# EAGLE board 13433-SparkFun-OpenPIR-NCS36000-panel.v10 (EAGLE 7.5.0), part 1 of 3
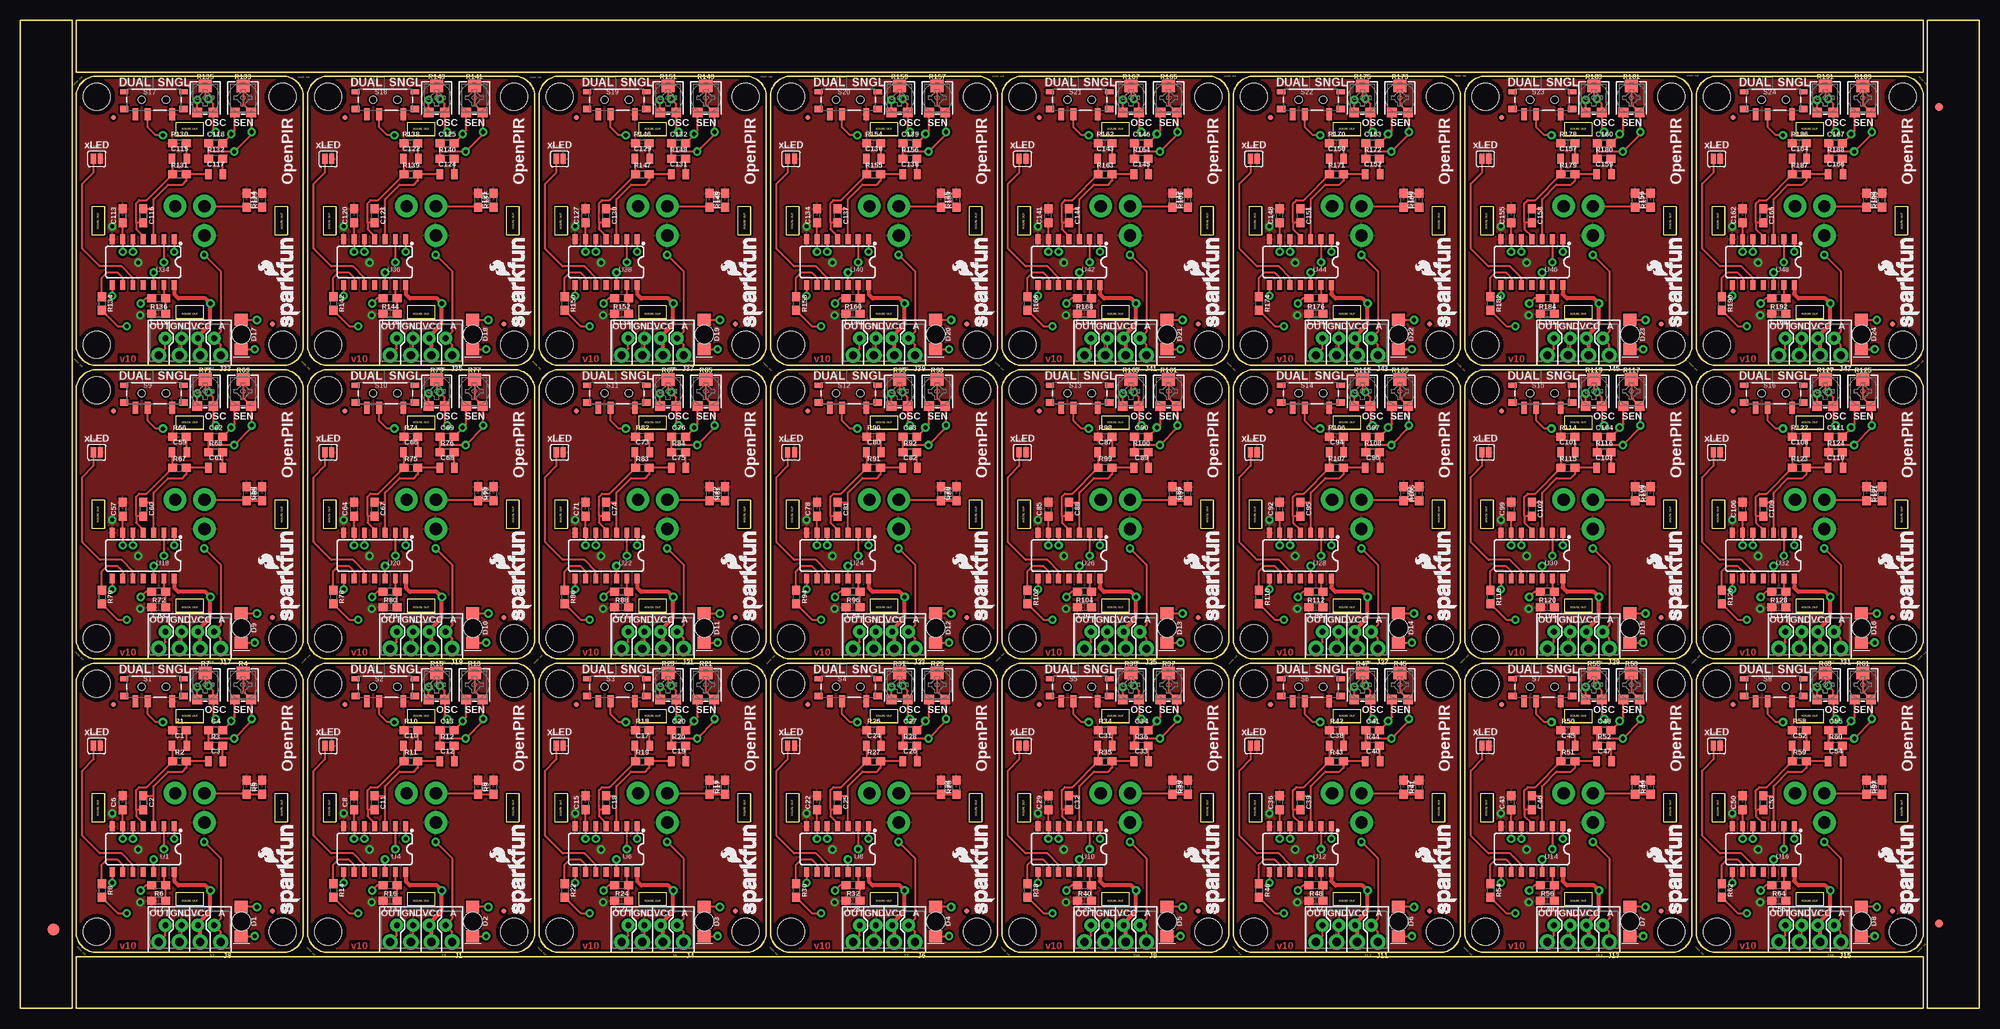
[diagram p0: board, top side]
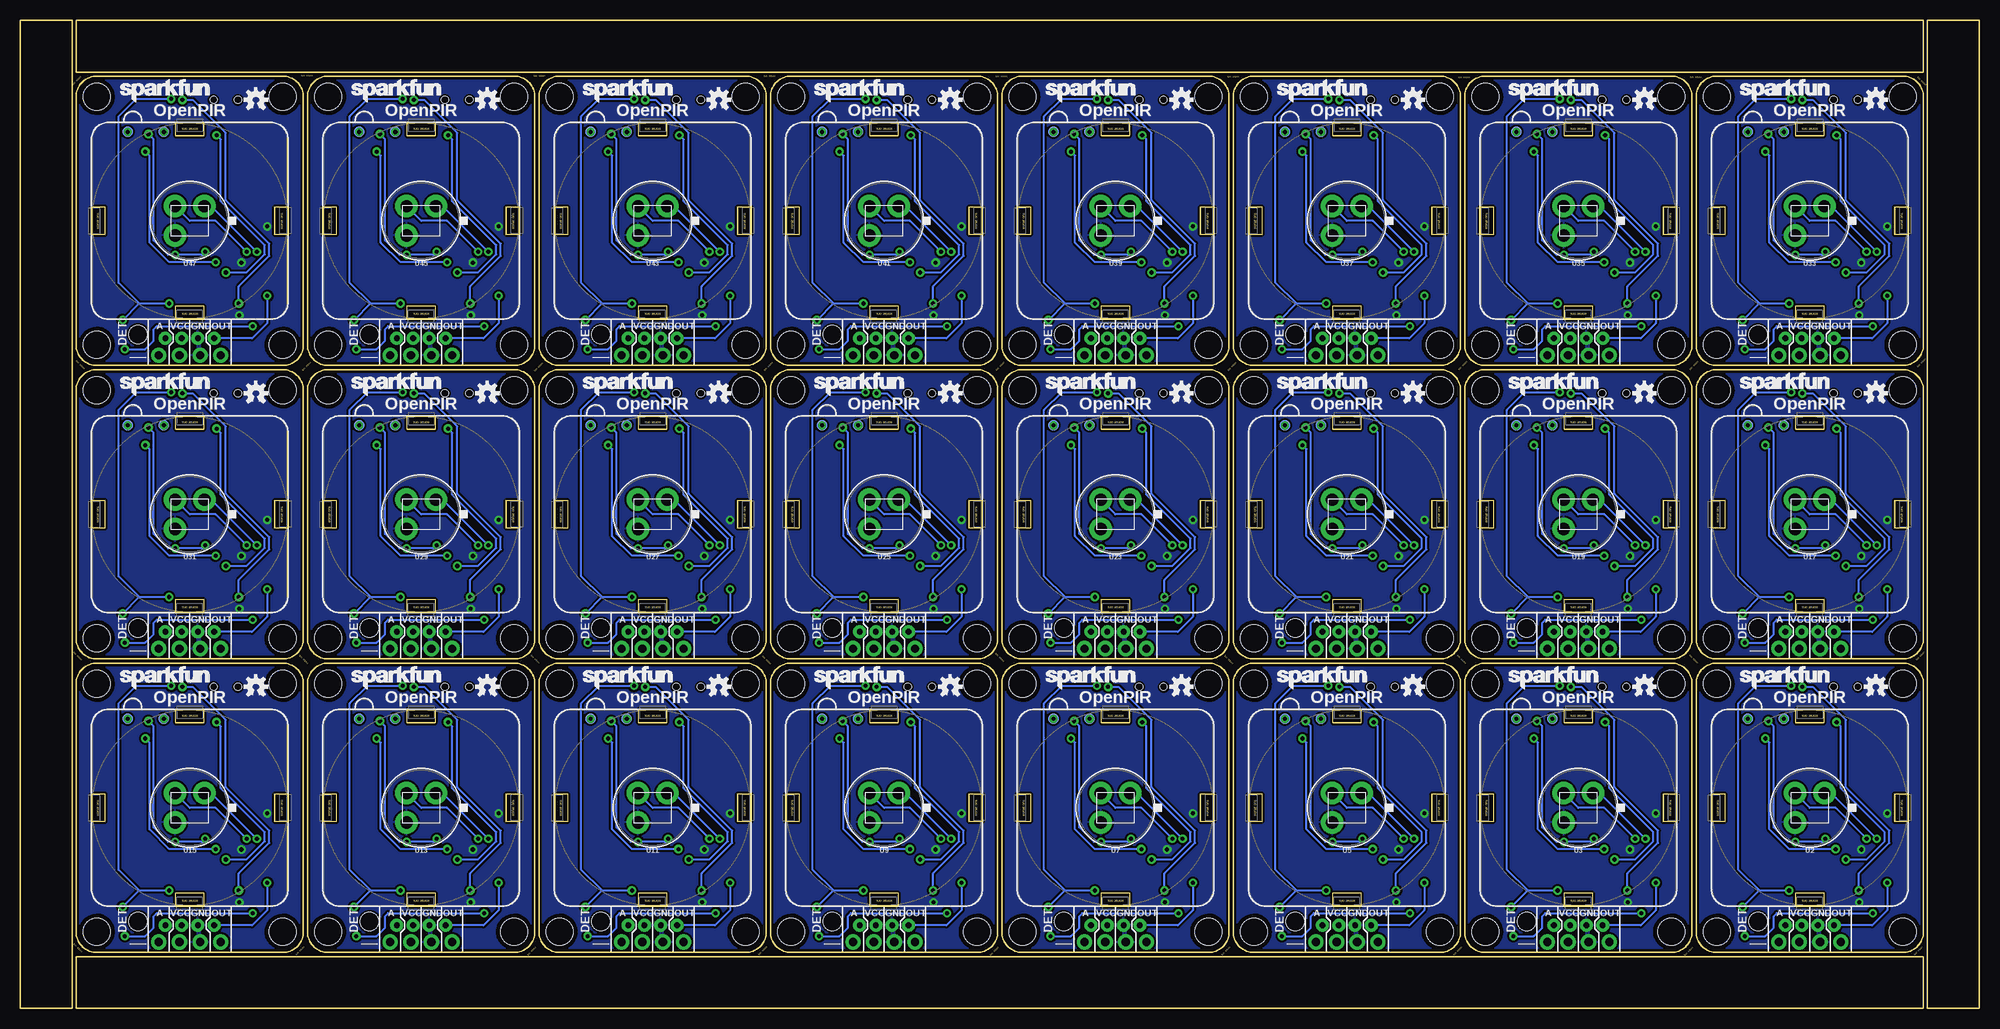
[diagram p1: board, bottom side, seen from below]

Size 240.79 x 121.41 mm. Coordinates in mm from the lower left corner, seen from the top.
Outline: 216 segments
Copper layers (1*16): Top 0.035mm / dielectric 1.5mm / Bottom 0.035mm
Design rules "SparkFun-2-layer-STANDARD": minimum track width 10mil, minimum drill 20mil, track to track 10mil, track to pad 8mil, pad to pad 8mil, via to via 10mil, smd to smd 8mil, copper to edge 8mil, drill to drill 8mil, minimum pad ring 10mil, minimum via ring 10mil, stop-mask expansion 4mil, vias tented up to drill 25mil, thermal gap 10mil

## Footprints (pad centres in the part's own frame; a part is rotated, then mirrored left to right if it is on the bottom)
0805 = smd 0.8 x 1.2: 1 -0.9,0; 2 0.9,0
0603 = smd 1.1 x 1: 1 -0.85,0; 2 0.85,0
LED-1206-BOTTOM = smd 1.5 x 1.6: A -1.8,0; C 1.8,0 | hole 2.3: 0,0
FIDUCIAL-1.5X3 = smd 1.5 x 1.5: 1 0,0
FIDUCIAL-1X2 = smd 1 x 1: 1 0,0
MICRO-FIDUCIAL = smd 0.635 x 0.635: 1 0,0
STAND-OFF = hole 3.302: 0,0
1X04_NO_SILK_ALL_ROUND = drill 1.016 pad 1.88: 1 0,0; 2 2.54,0; 3 5.08,0; 4 7.62,0
JST-4-PTH-VERT-NS = drill 0.7 pad 1.6: 1 -3,-0.55; 2 -1,-0.55; 3 1,-0.55; 4 3,-0.55
TRIMPOT-TC33X = smd 1.2 x 1.2: 1 -1,-1.8; 3 1,-1.8 | smd 1.6 x 1.5: 2 0,1.45
SWITCH-SPST-SMD-A = smd 0.7 x 1.5: 1 -2.25,-1.75; 2 -0.75,-1.75; 3 2.25,-1.75 | smd 1 x 0.6: GND1 -3.65,1; GND3 3.65,1 | smd 1 x 0.8: GND2 -3.65,-1.1; GND4 3.65,-1.1 | hole 0.9: -1.5,0; 1.5,0
SJ_2S = smd 0.635 x 1.27: 1 -0.412,0; 2 0.412,0
PAD.03X.05 = smd 1.27 x 1.27: P$1 0,0
SO14 = smd 0.6 x 1.2: 1 -3.81,-2.8; 2 -2.54,-2.8; 3 -1.27,-2.8; 4 0,-2.8; 5 1.27,-2.8; 6 2.54,-2.8; 7 3.81,-2.8; 8 3.81,2.8; 9 2.54,2.8; 10 1.27,2.8; 11 0,2.8; 12 -1.27,2.8; 13 -2.54,2.8; 14 -3.81,2.8
PIR = drill 1.5 pad 2.75: D -1.8,-1.8; G 1.8,1.8; S 1.8,-1.8

## Placement (x,y rotation side)
C1  22uF  [0805]  19.56,32.26 0 top
C2  10nF  [0603]  15.11,25.27 270 top
C3  22uF  [0805]  24,30.35 0 top
C4  10nF  [0603]  24,34.16 0 top
C5  0.1uF  [0603]  29.72,27.18 90 top
C6  0.1uF  [0603]  12.57,25.27 90 top
C7  0.1uF  [0603]  17.02,13.21 180 top
C8  0.1uF  [0603]  41.02,25.27 90 top
C9  0.1uF  [0603]  58.17,27.18 90 top
C10  22uF  [0805]  48.01,32.26 0 top
C11  10nF  [0603]  43.56,25.27 270 top
C12  22uF  [0805]  52.45,30.35 0 top
C13  10nF  [0603]  52.45,34.16 0 top
C14  0.1uF  [0603]  45.47,13.21 180 top
C15  0.1uF  [0603]  69.47,25.27 90 top
C16  0.1uF  [0603]  86.61,27.18 90 top
C17  22uF  [0805]  76.45,32.26 0 top
C18  10nF  [0603]  72.01,25.27 270 top
C19  22uF  [0805]  80.9,30.35 0 top
C20  10nF  [0603]  80.9,34.16 0 top
C21  0.1uF  [0603]  73.91,13.21 180 top
C22  0.1uF  [0603]  97.92,25.27 90 top
C23  0.1uF  [0603]  115.06,27.18 90 top
C24  22uF  [0805]  104.9,32.26 0 top
C25  10nF  [0603]  100.46,25.27 270 top
C26  22uF  [0805]  109.35,30.35 0 top
C27  10nF  [0603]  109.35,34.16 0 top
C28  0.1uF  [0603]  102.36,13.21 180 top
C29  0.1uF  [0603]  126.36,25.27 90 top
C30  0.1uF  [0603]  143.51,27.18 90 top
C31  22uF  [0805]  133.35,32.26 0 top
C32  10nF  [0603]  128.91,25.27 270 top
C33  22uF  [0805]  137.79,30.35 0 top
C34  10nF  [0603]  137.79,34.16 0 top
C35  0.1uF  [0603]  130.81,13.21 180 top
C36  0.1uF  [0603]  154.81,25.27 90 top
C37  0.1uF  [0603]  171.96,27.18 90 top
C38  22uF  [0805]  161.8,32.26 0 top
C39  10nF  [0603]  157.35,25.27 270 top
C40  22uF  [0805]  166.24,30.35 0 top
C41  10nF  [0603]  166.24,34.16 0 top
C42  0.1uF  [0603]  159.26,13.21 180 top
C43  0.1uF  [0603]  183.26,25.27 90 top
C44  0.1uF  [0603]  200.41,27.18 90 top
C45  22uF  [0805]  190.25,32.26 0 top
C46  10nF  [0603]  185.8,25.27 270 top
C47  22uF  [0805]  194.69,30.35 0 top
C48  10nF  [0603]  194.69,34.16 0 top
C49  0.1uF  [0603]  187.71,13.21 180 top
C50  0.1uF  [0603]  211.71,25.27 90 top
C51  0.1uF  [0603]  228.85,27.18 90 top
C52  22uF  [0805]  218.69,32.26 0 top
C53  10nF  [0603]  214.25,25.27 270 top
C54  22uF  [0805]  223.14,30.35 0 top
C55  10nF  [0603]  223.14,34.16 0 top
C56  0.1uF  [0603]  216.15,13.21 180 top
C57  0.1uF  [0603]  12.57,61.34 90 top
C58  0.1uF  [0603]  29.72,63.25 90 top
C59  22uF  [0805]  19.56,68.33 0 top
C60  10nF  [0603]  15.11,61.34 270 top
C61  22uF  [0805]  24,66.42 0 top
C62  10nF  [0603]  24,70.23 0 top
C63  0.1uF  [0603]  17.02,49.28 180 top
C64  0.1uF  [0603]  41.02,61.34 90 top
C65  0.1uF  [0603]  58.17,63.25 90 top
C66  22uF  [0805]  48.01,68.33 0 top
C67  10nF  [0603]  43.56,61.34 270 top
C68  22uF  [0805]  52.45,66.42 0 top
C69  10nF  [0603]  52.45,70.23 0 top
C70  0.1uF  [0603]  45.47,49.28 180 top
C71  0.1uF  [0603]  69.47,61.34 90 top
C72  0.1uF  [0603]  86.61,63.25 90 top
C73  22uF  [0805]  76.45,68.33 0 top
C74  10nF  [0603]  72.01,61.34 270 top
C75  22uF  [0805]  80.9,66.42 0 top
C76  10nF  [0603]  80.9,70.23 0 top
C77  0.1uF  [0603]  73.91,49.28 180 top
C78  0.1uF  [0603]  97.92,61.34 90 top
C79  0.1uF  [0603]  115.06,63.25 90 top
C80  22uF  [0805]  104.9,68.33 0 top
C81  10nF  [0603]  100.46,61.34 270 top
C82  22uF  [0805]  109.35,66.42 0 top
C83  10nF  [0603]  109.35,70.23 0 top
C84  0.1uF  [0603]  102.36,49.28 180 top
C85  0.1uF  [0603]  126.36,61.34 90 top
C86  0.1uF  [0603]  143.51,63.25 90 top
C87  22uF  [0805]  133.35,68.33 0 top
C88  10nF  [0603]  128.91,61.34 270 top
C89  22uF  [0805]  137.79,66.42 0 top
C90  10nF  [0603]  137.79,70.23 0 top
C91  0.1uF  [0603]  130.81,49.28 180 top
C92  0.1uF  [0603]  154.81,61.34 90 top
C93  0.1uF  [0603]  171.96,63.25 90 top
C94  22uF  [0805]  161.8,68.33 0 top
C95  10nF  [0603]  157.35,61.34 270 top
C96  22uF  [0805]  166.24,66.42 0 top
C97  10nF  [0603]  166.24,70.23 0 top
C98  0.1uF  [0603]  159.26,49.28 180 top
C99  0.1uF  [0603]  183.26,61.34 90 top
C100  0.1uF  [0603]  200.41,63.25 90 top
C101  22uF  [0805]  190.25,68.33 0 top
C102  10nF  [0603]  185.8,61.34 270 top
C103  22uF  [0805]  194.69,66.42 0 top
C104  10nF  [0603]  194.69,70.23 0 top
C105  0.1uF  [0603]  187.71,49.28 180 top
C106  0.1uF  [0603]  211.71,61.34 90 top
C107  0.1uF  [0603]  228.85,63.25 90 top
C108  22uF  [0805]  218.69,68.33 0 top
C109  10nF  [0603]  214.25,61.34 270 top
C110  22uF  [0805]  223.14,66.42 0 top
C111  10nF  [0603]  223.14,70.23 0 top
C112  0.1uF  [0603]  216.15,49.28 180 top
C113  0.1uF  [0603]  12.57,97.41 90 top
C114  0.1uF  [0603]  29.72,99.31 90 top
C115  22uF  [0805]  19.56,104.39 0 top
C116  10nF  [0603]  15.11,97.41 270 top
C117  22uF  [0805]  24,102.49 0 top
C118  10nF  [0603]  24,106.3 0 top
C119  0.1uF  [0603]  17.02,85.34 180 top
C120  0.1uF  [0603]  41.02,97.41 90 top
C121  0.1uF  [0603]  58.17,99.31 90 top
C122  22uF  [0805]  48.01,104.39 0 top
C123  10nF  [0603]  43.56,97.41 270 top
C124  22uF  [0805]  52.45,102.49 0 top
C125  10nF  [0603]  52.45,106.3 0 top
C126  0.1uF  [0603]  45.47,85.34 180 top
C127  0.1uF  [0603]  69.47,97.41 90 top
C128  0.1uF  [0603]  86.61,99.31 90 top
C129  22uF  [0805]  76.45,104.39 0 top
C130  10nF  [0603]  72.01,97.41 270 top
C131  22uF  [0805]  80.9,102.49 0 top
C132  10nF  [0603]  80.9,106.3 0 top
C133  0.1uF  [0603]  73.91,85.34 180 top
C134  0.1uF  [0603]  97.92,97.41 90 top
C135  0.1uF  [0603]  115.06,99.31 90 top
C136  22uF  [0805]  104.9,104.39 0 top
C137  10nF  [0603]  100.46,97.41 270 top
C138  22uF  [0805]  109.35,102.49 0 top
C139  10nF  [0603]  109.35,106.3 0 top
C140  0.1uF  [0603]  102.36,85.34 180 top
C141  0.1uF  [0603]  126.36,97.41 90 top
C142  0.1uF  [0603]  143.51,99.31 90 top
C143  22uF  [0805]  133.35,104.39 0 top
C144  10nF  [0603]  128.91,97.41 270 top
C145  22uF  [0805]  137.79,102.49 0 top
C146  10nF  [0603]  137.79,106.3 0 top
C147  0.1uF  [0603]  130.81,85.34 180 top
C148  0.1uF  [0603]  154.81,97.41 90 top
C149  0.1uF  [0603]  171.96,99.31 90 top
C150  22uF  [0805]  161.8,104.39 0 top
C151  10nF  [0603]  157.35,97.41 270 top
C152  22uF  [0805]  166.24,102.49 0 top
C153  10nF  [0603]  166.24,106.3 0 top
C154  0.1uF  [0603]  159.26,85.34 180 top
C155  0.1uF  [0603]  183.26,97.41 90 top
C156  0.1uF  [0603]  200.41,99.31 90 top
C157  22uF  [0805]  190.25,104.39 0 top
C158  10nF  [0603]  185.8,97.41 270 top
C159  22uF  [0805]  194.69,102.49 0 top
C160  10nF  [0603]  194.69,106.3 0 top
C161  0.1uF  [0603]  187.71,85.34 180 top
C162  0.1uF  [0603]  211.71,97.41 90 top
C163  0.1uF  [0603]  228.85,99.31 90 top
C164  22uF  [0805]  218.69,104.39 0 top
C165  10nF  [0603]  214.25,97.41 270 top
C166  22uF  [0805]  223.14,102.49 0 top
C167  10nF  [0603]  223.14,106.3 0 top
C168  0.1uF  [0603]  216.15,85.34 180 top
D1  Green  [LED-1206-BOTTOM]  27.18,10.67 270 top
D2  Green  [LED-1206-BOTTOM]  55.63,10.67 270 top
D3  Green  [LED-1206-BOTTOM]  84.07,10.67 270 top
D4  Green  [LED-1206-BOTTOM]  112.52,10.67 270 top
D5  Green  [LED-1206-BOTTOM]  140.97,10.67 270 top
D6  Green  [LED-1206-BOTTOM]  169.42,10.67 270 top
D7  Green  [LED-1206-BOTTOM]  197.87,10.67 270 top
D8  Green  [LED-1206-BOTTOM]  226.31,10.67 270 top
D9  Green  [LED-1206-BOTTOM]  27.18,46.74 270 top
D10  Green  [LED-1206-BOTTOM]  55.63,46.74 270 top
D11  Green  [LED-1206-BOTTOM]  84.07,46.74 270 top
D12  Green  [LED-1206-BOTTOM]  112.52,46.74 270 top
D13  Green  [LED-1206-BOTTOM]  140.97,46.74 270 top
D14  Green  [LED-1206-BOTTOM]  169.42,46.74 270 top
D15  Green  [LED-1206-BOTTOM]  197.87,46.74 270 top
D16  Green  [LED-1206-BOTTOM]  226.31,46.74 270 top
D17  Green  [LED-1206-BOTTOM]  27.18,82.8 270 top
D18  Green  [LED-1206-BOTTOM]  55.63,82.8 270 top
D19  Green  [LED-1206-BOTTOM]  84.07,82.8 270 top
D20  Green  [LED-1206-BOTTOM]  112.52,82.8 270 top
D21  Green  [LED-1206-BOTTOM]  140.97,82.8 270 top
D22  Green  [LED-1206-BOTTOM]  169.42,82.8 270 top
D23  Green  [LED-1206-BOTTOM]  197.87,82.8 270 top
D24  Green  [LED-1206-BOTTOM]  226.31,82.8 270 top
E$1  [FIDUCIAL-1.5X3]  4.06,9.65 0 top
E$5  [FIDUCIAL-1X2]  235.84,110.74 180 top
E$6  [FIDUCIAL-1X2]  235.84,10.41 0 top
FD1  FIDUCIALUFIDUCIAL  [MICRO-FIDUCIAL]  11.43,37.34 0 top
FD2  FIDUCIALUFIDUCIAL  [MICRO-FIDUCIAL]  30.99,11.94 0 top
FD3  FIDUCIALUFIDUCIAL  [MICRO-FIDUCIAL]  39.88,37.34 0 top
FD4  FIDUCIALUFIDUCIAL  [MICRO-FIDUCIAL]  59.44,11.94 0 top
FD5  FIDUCIALUFIDUCIAL  [MICRO-FIDUCIAL]  68.33,37.34 0 top
FD6  FIDUCIALUFIDUCIAL  [MICRO-FIDUCIAL]  87.88,11.94 0 top
FD7  FIDUCIALUFIDUCIAL  [MICRO-FIDUCIAL]  96.77,37.34 0 top
FD8  FIDUCIALUFIDUCIAL  [MICRO-FIDUCIAL]  116.33,11.94 0 top
FD9  FIDUCIALUFIDUCIAL  [MICRO-FIDUCIAL]  125.22,37.34 0 top
FD10  FIDUCIALUFIDUCIAL  [MICRO-FIDUCIAL]  144.78,11.94 0 top
FD11  FIDUCIALUFIDUCIAL  [MICRO-FIDUCIAL]  153.67,37.34 0 top
FD12  FIDUCIALUFIDUCIAL  [MICRO-FIDUCIAL]  173.23,11.94 0 top
FD13  FIDUCIALUFIDUCIAL  [MICRO-FIDUCIAL]  182.12,37.34 0 top
FD14  FIDUCIALUFIDUCIAL  [MICRO-FIDUCIAL]  201.68,11.94 0 top
FD15  FIDUCIALUFIDUCIAL  [MICRO-FIDUCIAL]  210.57,37.34 0 top
FD16  FIDUCIALUFIDUCIAL  [MICRO-FIDUCIAL]  230.12,11.94 0 top
FD17  FIDUCIALUFIDUCIAL  [MICRO-FIDUCIAL]  11.43,73.41 0 top
FD18  FIDUCIALUFIDUCIAL  [MICRO-FIDUCIAL]  30.99,48.01 0 top
FD19  FIDUCIALUFIDUCIAL  [MICRO-FIDUCIAL]  39.88,73.41 0 top
FD20  FIDUCIALUFIDUCIAL  [MICRO-FIDUCIAL]  59.44,48.01 0 top
FD21  FIDUCIALUFIDUCIAL  [MICRO-FIDUCIAL]  68.33,73.41 0 top
FD22  FIDUCIALUFIDUCIAL  [MICRO-FIDUCIAL]  87.88,48.01 0 top
FD23  FIDUCIALUFIDUCIAL  [MICRO-FIDUCIAL]  96.77,73.41 0 top
FD24  FIDUCIALUFIDUCIAL  [MICRO-FIDUCIAL]  116.33,48.01 0 top
FD25  FIDUCIALUFIDUCIAL  [MICRO-FIDUCIAL]  125.22,73.41 0 top
FD26  FIDUCIALUFIDUCIAL  [MICRO-FIDUCIAL]  144.78,48.01 0 top
FD27  FIDUCIALUFIDUCIAL  [MICRO-FIDUCIAL]  153.67,73.41 0 top
FD28  FIDUCIALUFIDUCIAL  [MICRO-FIDUCIAL]  173.23,48.01 0 top
FD29  FIDUCIALUFIDUCIAL  [MICRO-FIDUCIAL]  182.12,73.41 0 top
FD30  FIDUCIALUFIDUCIAL  [MICRO-FIDUCIAL]  201.68,48.01 0 top
FD31  FIDUCIALUFIDUCIAL  [MICRO-FIDUCIAL]  210.57,73.41 0 top
FD32  FIDUCIALUFIDUCIAL  [MICRO-FIDUCIAL]  230.12,48.01 0 top
FD33  FIDUCIALUFIDUCIAL  [MICRO-FIDUCIAL]  11.43,109.47 0 top
FD34  FIDUCIALUFIDUCIAL  [MICRO-FIDUCIAL]  30.99,84.07 0 top
FD35  FIDUCIALUFIDUCIAL  [MICRO-FIDUCIAL]  39.88,109.47 0 top
FD36  FIDUCIALUFIDUCIAL  [MICRO-FIDUCIAL]  59.44,84.07 0 top
FD37  FIDUCIALUFIDUCIAL  [MICRO-FIDUCIAL]  68.33,109.47 0 top
FD38  FIDUCIALUFIDUCIAL  [MICRO-FIDUCIAL]  87.88,84.07 0 top
FD39  FIDUCIALUFIDUCIAL  [MICRO-FIDUCIAL]  96.77,109.47 0 top
FD40  FIDUCIALUFIDUCIAL  [MICRO-FIDUCIAL]  116.33,84.07 0 top
FD41  FIDUCIALUFIDUCIAL  [MICRO-FIDUCIAL]  125.22,109.47 0 top
FD42  FIDUCIALUFIDUCIAL  [MICRO-FIDUCIAL]  144.78,84.07 0 top
FD43  FIDUCIALUFIDUCIAL  [MICRO-FIDUCIAL]  153.67,109.47 0 top
FD44  FIDUCIALUFIDUCIAL  [MICRO-FIDUCIAL]  173.23,84.07 0 top
FD45  FIDUCIALUFIDUCIAL  [MICRO-FIDUCIAL]  182.12,109.47 0 top
FD46  FIDUCIALUFIDUCIAL  [MICRO-FIDUCIAL]  201.68,84.07 0 top
FD47  FIDUCIALUFIDUCIAL  [MICRO-FIDUCIAL]  210.57,109.47 0 top
FD48  FIDUCIALUFIDUCIAL  [MICRO-FIDUCIAL]  230.12,84.07 0 top
H1  STAND-OFF  [STAND-OFF]  9.4,39.88 0 top
H2  STAND-OFF  [STAND-OFF]  32.26,39.88 0 top
H3  STAND-OFF  [STAND-OFF]  9.4,9.4 0 top
H4  STAND-OFF  [STAND-OFF]  32.26,9.4 0 top
H5  STAND-OFF  [STAND-OFF]  37.85,39.88 0 top
H6  STAND-OFF  [STAND-OFF]  60.71,39.88 0 top
H7  STAND-OFF  [STAND-OFF]  37.85,9.4 0 top
H8  STAND-OFF  [STAND-OFF]  60.71,9.4 0 top
H9  STAND-OFF  [STAND-OFF]  66.29,39.88 0 top
H10  STAND-OFF  [STAND-OFF]  89.15,39.88 0 top
H11  STAND-OFF  [STAND-OFF]  66.29,9.4 0 top
H12  STAND-OFF  [STAND-OFF]  89.15,9.4 0 top
H13  STAND-OFF  [STAND-OFF]  94.74,39.88 0 top
H14  STAND-OFF  [STAND-OFF]  117.6,39.88 0 top
H15  STAND-OFF  [STAND-OFF]  94.74,9.4 0 top
H16  STAND-OFF  [STAND-OFF]  117.6,9.4 0 top
H17  STAND-OFF  [STAND-OFF]  123.19,39.88 0 top
H18  STAND-OFF  [STAND-OFF]  146.05,39.88 0 top
H19  STAND-OFF  [STAND-OFF]  123.19,9.4 0 top
H20  STAND-OFF  [STAND-OFF]  146.05,9.4 0 top
H21  STAND-OFF  [STAND-OFF]  151.64,39.88 0 top
H22  STAND-OFF  [STAND-OFF]  174.5,39.88 0 top
H23  STAND-OFF  [STAND-OFF]  151.64,9.4 0 top
H24  STAND-OFF  [STAND-OFF]  174.5,9.4 0 top
H25  STAND-OFF  [STAND-OFF]  180.09,39.88 0 top
H26  STAND-OFF  [STAND-OFF]  202.95,39.88 0 top
H27  STAND-OFF  [STAND-OFF]  180.09,9.4 0 top
H28  STAND-OFF  [STAND-OFF]  202.95,9.4 0 top
H29  STAND-OFF  [STAND-OFF]  208.53,39.88 0 top
H30  STAND-OFF  [STAND-OFF]  231.39,39.88 0 top
H31  STAND-OFF  [STAND-OFF]  208.53,9.4 0 top
H32  STAND-OFF  [STAND-OFF]  231.39,9.4 0 top
H33  STAND-OFF  [STAND-OFF]  9.4,75.95 0 top
H34  STAND-OFF  [STAND-OFF]  32.26,75.95 0 top
H35  STAND-OFF  [STAND-OFF]  9.4,45.47 0 top
H36  STAND-OFF  [STAND-OFF]  32.26,45.47 0 top
H37  STAND-OFF  [STAND-OFF]  37.85,75.95 0 top
H38  STAND-OFF  [STAND-OFF]  60.71,75.95 0 top
H39  STAND-OFF  [STAND-OFF]  37.85,45.47 0 top
H40  STAND-OFF  [STAND-OFF]  60.71,45.47 0 top
H41  STAND-OFF  [STAND-OFF]  66.29,75.95 0 top
H42  STAND-OFF  [STAND-OFF]  89.15,75.95 0 top
H43  STAND-OFF  [STAND-OFF]  66.29,45.47 0 top
H44  STAND-OFF  [STAND-OFF]  89.15,45.47 0 top
H45  STAND-OFF  [STAND-OFF]  94.74,75.95 0 top
H46  STAND-OFF  [STAND-OFF]  117.6,75.95 0 top
H47  STAND-OFF  [STAND-OFF]  94.74,45.47 0 top
H48  STAND-OFF  [STAND-OFF]  117.6,45.47 0 top
H49  STAND-OFF  [STAND-OFF]  123.19,75.95 0 top
H50  STAND-OFF  [STAND-OFF]  146.05,75.95 0 top
H51  STAND-OFF  [STAND-OFF]  123.19,45.47 0 top
H52  STAND-OFF  [STAND-OFF]  146.05,45.47 0 top
H53  STAND-OFF  [STAND-OFF]  151.64,75.95 0 top
H54  STAND-OFF  [STAND-OFF]  174.5,75.95 0 top
H55  STAND-OFF  [STAND-OFF]  151.64,45.47 0 top
H56  STAND-OFF  [STAND-OFF]  174.5,45.47 0 top
H57  STAND-OFF  [STAND-OFF]  180.09,75.95 0 top
H58  STAND-OFF  [STAND-OFF]  202.95,75.95 0 top
H59  STAND-OFF  [STAND-OFF]  180.09,45.47 0 top
H60  STAND-OFF  [STAND-OFF]  202.95,45.47 0 top
H61  STAND-OFF  [STAND-OFF]  208.53,75.95 0 top
H62  STAND-OFF  [STAND-OFF]  231.39,75.95 0 top
H63  STAND-OFF  [STAND-OFF]  208.53,45.47 0 top
H64  STAND-OFF  [STAND-OFF]  231.39,45.47 0 top
H65  STAND-OFF  [STAND-OFF]  9.4,112.01 0 top
H66  STAND-OFF  [STAND-OFF]  32.26,112.01 0 top
H67  STAND-OFF  [STAND-OFF]  9.4,81.53 0 top
H68  STAND-OFF  [STAND-OFF]  32.26,81.53 0 top
H69  STAND-OFF  [STAND-OFF]  37.85,112.01 0 top
H70  STAND-OFF  [STAND-OFF]  60.71,112.01 0 top
H71  STAND-OFF  [STAND-OFF]  37.85,81.53 0 top
H72  STAND-OFF  [STAND-OFF]  60.71,81.53 0 top
H73  STAND-OFF  [STAND-OFF]  66.29,112.01 0 top
H74  STAND-OFF  [STAND-OFF]  89.15,112.01 0 top
H75  STAND-OFF  [STAND-OFF]  66.29,81.53 0 top
H76  STAND-OFF  [STAND-OFF]  89.15,81.53 0 top
H77  STAND-OFF  [STAND-OFF]  94.74,112.01 0 top
H78  STAND-OFF  [STAND-OFF]  117.6,112.01 0 top
H79  STAND-OFF  [STAND-OFF]  94.74,81.53 0 top
H80  STAND-OFF  [STAND-OFF]  117.6,81.53 0 top
H81  STAND-OFF  [STAND-OFF]  123.19,112.01 0 top
H82  STAND-OFF  [STAND-OFF]  146.05,112.01 0 top
H83  STAND-OFF  [STAND-OFF]  123.19,81.53 0 top
H84  STAND-OFF  [STAND-OFF]  146.05,81.53 0 top
H85  STAND-OFF  [STAND-OFF]  151.64,112.01 0 top
H86  STAND-OFF  [STAND-OFF]  174.5,112.01 0 top
H87  STAND-OFF  [STAND-OFF]  151.64,81.53 0 top
H88  STAND-OFF  [STAND-OFF]  174.5,81.53 0 top
H89  STAND-OFF  [STAND-OFF]  180.09,112.01 0 top
H90  STAND-OFF  [STAND-OFF]  202.95,112.01 0 top
H91  STAND-OFF  [STAND-OFF]  180.09,81.53 0 top
H92  STAND-OFF  [STAND-OFF]  202.95,81.53 0 top
H93  STAND-OFF  [STAND-OFF]  208.53,112.01 0 top
H94  STAND-OFF  [STAND-OFF]  231.39,112.01 0 top
H95  STAND-OFF  [STAND-OFF]  208.53,81.53 0 top
H96  STAND-OFF  [STAND-OFF]  231.39,81.53 0 top
J1  [1X04_NO_SILK_ALL_ROUND]  53.09,8.13 180 top
J2  [JST-4-PTH-VERT-NS]  20.83,9.65 180 top
J3  [JST-4-PTH-VERT-NS]  49.28,9.65 180 top
J4  [1X04_NO_SILK_ALL_ROUND]  81.53,8.13 180 top
J5  [JST-4-PTH-VERT-NS]  77.72,9.65 180 top
J6  [1X04_NO_SILK_ALL_ROUND]  109.98,8.13 180 top
J7  [JST-4-PTH-VERT-NS]  106.17,9.65 180 top
J8  [1X04_NO_SILK_ALL_ROUND]  24.64,8.13 180 top
J9  [1X04_NO_SILK_ALL_ROUND]  138.43,8.13 180 top
J10  [JST-4-PTH-VERT-NS]  134.62,9.65 180 top
J11  [1X04_NO_SILK_ALL_ROUND]  166.88,8.13 180 top
J12  [JST-4-PTH-VERT-NS]  163.07,9.65 180 top
J13  [1X04_NO_SILK_ALL_ROUND]  195.33,8.13 180 top
J14  [JST-4-PTH-VERT-NS]  191.52,9.65 180 top
J15  [1X04_NO_SILK_ALL_ROUND]  223.77,8.13 180 top
J16  [JST-4-PTH-VERT-NS]  219.96,9.65 180 top
J17  [1X04_NO_SILK_ALL_ROUND]  24.64,44.2 180 top
J18  [JST-4-PTH-VERT-NS]  20.83,45.72 180 top
J19  [1X04_NO_SILK_ALL_ROUND]  53.09,44.2 180 top
J20  [JST-4-PTH-VERT-NS]  49.28,45.72 180 top
J21  [1X04_NO_SILK_ALL_ROUND]  81.53,44.2 180 top
J22  [JST-4-PTH-VERT-NS]  77.72,45.72 180 top
J23  [1X04_NO_SILK_ALL_ROUND]  109.98,44.2 180 top
J24  [JST-4-PTH-VERT-NS]  106.17,45.72 180 top
J25  [1X04_NO_SILK_ALL_ROUND]  138.43,44.2 180 top
J26  [JST-4-PTH-VERT-NS]  134.62,45.72 180 top
J27  [1X04_NO_SILK_ALL_ROUND]  166.88,44.2 180 top
J28  [JST-4-PTH-VERT-NS]  163.07,45.72 180 top
J29  [1X04_NO_SILK_ALL_ROUND]  195.33,44.2 180 top
J30  [JST-4-PTH-VERT-NS]  191.52,45.72 180 top
J31  [1X04_NO_SILK_ALL_ROUND]  223.77,44.2 180 top
J32  [JST-4-PTH-VERT-NS]  219.96,45.72 180 top
J33  [1X04_NO_SILK_ALL_ROUND]  24.64,80.26 180 top
J34  [JST-4-PTH-VERT-NS]  20.83,81.79 180 top
J35  [1X04_NO_SILK_ALL_ROUND]  53.09,80.26 180 top
J36  [JST-4-PTH-VERT-NS]  49.28,81.79 180 top
J37  [1X04_NO_SILK_ALL_ROUND]  81.53,80.26 180 top
J38  [JST-4-PTH-VERT-NS]  77.72,81.79 180 top
J39  [1X04_NO_SILK_ALL_ROUND]  109.98,80.26 180 top
J40  [JST-4-PTH-VERT-NS]  106.17,81.79 180 top
J41  [1X04_NO_SILK_ALL_ROUND]  138.43,80.26 180 top
J42  [JST-4-PTH-VERT-NS]  134.62,81.79 180 top
J43  [1X04_NO_SILK_ALL_ROUND]  166.88,80.26 180 top
J44  [JST-4-PTH-VERT-NS]  163.07,81.79 180 top
J45  [1X04_NO_SILK_ALL_ROUND]  195.33,80.26 180 top
J46  [JST-4-PTH-VERT-NS]  191.52,81.79 180 top
J47  [1X04_NO_SILK_ALL_ROUND]  223.77,80.26 180 top
J48  [JST-4-PTH-VERT-NS]  219.96,81.79 180 top
LOGO1  SFE_LOGO_NAME_FLAME.1_INCH  [SFE_LOGO_NAME_FLAME_.1]  34.42,11.18 90 top
LOGO2  SFE_LOGO_NAME_FLAME.1_INCH  [SFE_LOGO_NAME_FLAME_.1]  62.87,11.18 90 top
LOGO3  SFE_LOGO_NAME.1_INCH  [SFE_LOGO_NAME_.1]  29.84,38.73 0 bottom
LOGO4  OSHW-LOGOS  [OSHW-LOGO-S]  12.7,39.5 0 bottom
LOGO5  SFE_LOGO_NAME.1_INCH  [SFE_LOGO_NAME_.1]  58.29,38.73 0 bottom
LOGO6  OSHW-LOGOS  [OSHW-LOGO-S]  41.15,39.5 0 bottom
LOGO7  SFE_LOGO_NAME_FLAME.1_INCH  [SFE_LOGO_NAME_FLAME_.1]  91.31,11.18 90 top
LOGO8  SFE_LOGO_NAME.1_INCH  [SFE_LOGO_NAME_.1]  86.74,38.73 0 bottom
LOGO9  OSHW-LOGOS  [OSHW-LOGO-S]  69.6,39.5 0 bottom
LOGO10  SFE_LOGO_NAME_FLAME.1_INCH  [SFE_LOGO_NAME_FLAME_.1]  119.76,11.18 90 top
LOGO11  SFE_LOGO_NAME.1_INCH  [SFE_LOGO_NAME_.1]  115.19,38.73 0 bottom
LOGO12  OSHW-LOGOS  [OSHW-LOGO-S]  98.04,39.5 0 bottom
LOGO13  SFE_LOGO_NAME_FLAME.1_INCH  [SFE_LOGO_NAME_FLAME_.1]  148.21,11.18 90 top
LOGO14  SFE_LOGO_NAME.1_INCH  [SFE_LOGO_NAME_.1]  143.64,38.73 0 bottom
LOGO15  OSHW-LOGOS  [OSHW-LOGO-S]  126.49,39.5 0 bottom
LOGO16  SFE_LOGO_NAME_FLAME.1_INCH  [SFE_LOGO_NAME_FLAME_.1]  176.66,11.18 90 top
LOGO17  SFE_LOGO_NAME.1_INCH  [SFE_LOGO_NAME_.1]  172.09,38.73 0 bottom
LOGO18  OSHW-LOGOS  [OSHW-LOGO-S]  154.94,39.5 0 bottom
LOGO19  SFE_LOGO_NAME_FLAME.1_INCH  [SFE_LOGO_NAME_FLAME_.1]  205.1,11.18 90 top
LOGO20  SFE_LOGO_NAME.1_INCH  [SFE_LOGO_NAME_.1]  200.53,38.73 0 bottom
LOGO21  OSHW-LOGOS  [OSHW-LOGO-S]  183.39,39.5 0 bottom
LOGO22  SFE_LOGO_NAME_FLAME.1_INCH  [SFE_LOGO_NAME_FLAME_.1]  233.55,11.18 90 top
LOGO23  SFE_LOGO_NAME.1_INCH  [SFE_LOGO_NAME_.1]  228.98,38.73 0 bottom
LOGO24  OSHW-LOGOS  [OSHW-LOGO-S]  211.84,39.5 0 bottom
LOGO25  SFE_LOGO_NAME_FLAME.1_INCH  [SFE_LOGO_NAME_FLAME_.1]  34.42,47.24 90 top
LOGO26  SFE_LOGO_NAME.1_INCH  [SFE_LOGO_NAME_.1]  29.84,74.8 0 bottom
LOGO27  OSHW-LOGOS  [OSHW-LOGO-S]  12.7,75.56 0 bottom
LOGO28  SFE_LOGO_NAME_FLAME.1_INCH  [SFE_LOGO_NAME_FLAME_.1]  62.87,47.24 90 top
LOGO29  SFE_LOGO_NAME.1_INCH  [SFE_LOGO_NAME_.1]  58.29,74.8 0 bottom
LOGO30  OSHW-LOGOS  [OSHW-LOGO-S]  41.15,75.56 0 bottom
LOGO31  SFE_LOGO_NAME_FLAME.1_INCH  [SFE_LOGO_NAME_FLAME_.1]  91.31,47.24 90 top
LOGO32  SFE_LOGO_NAME.1_INCH  [SFE_LOGO_NAME_.1]  86.74,74.8 0 bottom
LOGO33  OSHW-LOGOS  [OSHW-LOGO-S]  69.6,75.56 0 bottom
LOGO34  SFE_LOGO_NAME_FLAME.1_INCH  [SFE_LOGO_NAME_FLAME_.1]  119.76,47.24 90 top
LOGO35  SFE_LOGO_NAME.1_INCH  [SFE_LOGO_NAME_.1]  115.19,74.8 0 bottom
LOGO36  OSHW-LOGOS  [OSHW-LOGO-S]  98.04,75.56 0 bottom
LOGO37  SFE_LOGO_NAME_FLAME.1_INCH  [SFE_LOGO_NAME_FLAME_.1]  148.21,47.24 90 top
LOGO38  SFE_LOGO_NAME.1_INCH  [SFE_LOGO_NAME_.1]  143.64,74.8 0 bottom
LOGO39  OSHW-LOGOS  [OSHW-LOGO-S]  126.49,75.56 0 bottom
LOGO40  SFE_LOGO_NAME_FLAME.1_INCH  [SFE_LOGO_NAME_FLAME_.1]  176.66,47.24 90 top
LOGO41  SFE_LOGO_NAME.1_INCH  [SFE_LOGO_NAME_.1]  172.09,74.8 0 bottom
LOGO42  OSHW-LOGOS  [OSHW-LOGO-S]  154.94,75.56 0 bottom
LOGO43  SFE_LOGO_NAME_FLAME.1_INCH  [SFE_LOGO_NAME_FLAME_.1]  205.1,47.24 90 top
LOGO44  SFE_LOGO_NAME.1_INCH  [SFE_LOGO_NAME_.1]  200.53,74.8 0 bottom
LOGO45  OSHW-LOGOS  [OSHW-LOGO-S]  183.39,75.56 0 bottom
LOGO46  SFE_LOGO_NAME_FLAME.1_INCH  [SFE_LOGO_NAME_FLAME_.1]  233.55,47.24 90 top
LOGO47  SFE_LOGO_NAME.1_INCH  [SFE_LOGO_NAME_.1]  228.98,74.8 0 bottom
LOGO48  OSHW-LOGOS  [OSHW-LOGO-S]  211.84,75.56 0 bottom
LOGO49  SFE_LOGO_NAME_FLAME.1_INCH  [SFE_LOGO_NAME_FLAME_.1]  34.42,83.31 90 top
LOGO50  SFE_LOGO_NAME.1_INCH  [SFE_LOGO_NAME_.1]  29.84,110.87 0 bottom
LOGO51  OSHW-LOGOS  [OSHW-LOGO-S]  12.7,111.63 0 bottom
LOGO52  SFE_LOGO_NAME_FLAME.1_INCH  [SFE_LOGO_NAME_FLAME_.1]  62.87,83.31 90 top
LOGO53  SFE_LOGO_NAME.1_INCH  [SFE_LOGO_NAME_.1]  58.29,110.87 0 bottom
LOGO54  OSHW-LOGOS  [OSHW-LOGO-S]  41.15,111.63 0 bottom
LOGO55  SFE_LOGO_NAME_FLAME.1_INCH  [SFE_LOGO_NAME_FLAME_.1]  91.31,83.31 90 top
LOGO56  SFE_LOGO_NAME.1_INCH  [SFE_LOGO_NAME_.1]  86.74,110.87 0 bottom
LOGO57  OSHW-LOGOS  [OSHW-LOGO-S]  69.6,111.63 0 bottom
LOGO58  SFE_LOGO_NAME_FLAME.1_INCH  [SFE_LOGO_NAME_FLAME_.1]  119.76,83.31 90 top
LOGO59  SFE_LOGO_NAME.1_INCH  [SFE_LOGO_NAME_.1]  115.19,110.87 0 bottom
LOGO60  OSHW-LOGOS  [OSHW-LOGO-S]  98.04,111.63 0 bottom
LOGO61  SFE_LOGO_NAME_FLAME.1_INCH  [SFE_LOGO_NAME_FLAME_.1]  148.21,83.31 90 top
LOGO62  SFE_LOGO_NAME.1_INCH  [SFE_LOGO_NAME_.1]  143.64,110.87 0 bottom
LOGO63  OSHW-LOGOS  [OSHW-LOGO-S]  126.49,111.63 0 bottom
LOGO64  SFE_LOGO_NAME_FLAME.1_INCH  [SFE_LOGO_NAME_FLAME_.1]  176.66,83.31 90 top
LOGO65  SFE_LOGO_NAME.1_INCH  [SFE_LOGO_NAME_.1]  172.09,110.87 0 bottom
LOGO66  OSHW-LOGOS  [OSHW-LOGO-S]  154.94,111.63 0 bottom
LOGO67  SFE_LOGO_NAME_FLAME.1_INCH  [SFE_LOGO_NAME_FLAME_.1]  205.1,83.31 90 top
LOGO68  SFE_LOGO_NAME.1_INCH  [SFE_LOGO_NAME_.1]  200.53,110.87 0 bottom
LOGO69  OSHW-LOGOS  [OSHW-LOGO-S]  183.39,111.63 0 bottom
LOGO70  SFE_LOGO_NAME_FLAME.1_INCH  [SFE_LOGO_NAME_FLAME_.1]  233.55,83.31 90 top
LOGO71  SFE_LOGO_NAME.1_INCH  [SFE_LOGO_NAME_.1]  228.98,110.87 0 bottom
LOGO72  OSHW-LOGOS  [OSHW-LOGO-S]  211.84,111.63 0 bottom
R1  10k  [0603]  19.56,34.16 0 top
R2  560k  [0603]  19.56,30.35 0 top
R3  10k  [0603]  24,32.26 0 top
R4  1M  [TRIMPOT-TC33X]  27.37,39.75 0 top
R5  43k  [0603]  27.81,27.18 270 top
R6  51k  [0603]  17.02,15.11 180 top
R7  1M  [TRIMPOT-TC33X]  22.73,39.75 0 top
R8  1k  [0603]  10.03,14.48 270 top
R9  43k  [0603]  56.26,27.18 270 top
R10  10k  [0603]  48.01,34.16 0 top
R11  560k  [0603]  48.01,30.35 0 top
R12  10k  [0603]  52.45,32.26 0 top
R13  1M  [TRIMPOT-TC33X]  55.82,39.75 0 top
R14  1k  [0603]  38.48,14.48 270 top
R15  1M  [TRIMPOT-TC33X]  51.18,39.75 0 top
R16  51k  [0603]  45.47,15.11 180 top
R17  43k  [0603]  84.71,27.18 270 top
R18  10k  [0603]  76.45,34.16 0 top
R19  560k  [0603]  76.45,30.35 0 top
R20  10k  [0603]  80.9,32.26 0 top
R21  1M  [TRIMPOT-TC33X]  84.26,39.75 0 top
R22  1k  [0603]  66.93,14.48 270 top
R23  1M  [TRIMPOT-TC33X]  79.63,39.75 0 top
R24  51k  [0603]  73.91,15.11 180 top
R25  43k  [0603]  113.16,27.18 270 top
R26  10k  [0603]  104.9,34.16 0 top
R27  560k  [0603]  104.9,30.35 0 top
R28  10k  [0603]  109.35,32.26 0 top
R29  1M  [TRIMPOT-TC33X]  112.71,39.75 0 top
R30  1k  [0603]  95.38,14.48 270 top
R31  1M  [TRIMPOT-TC33X]  108.08,39.75 0 top
R32  51k  [0603]  102.36,15.11 180 top
R33  43k  [0603]  141.6,27.18 270 top
R34  10k  [0603]  133.35,34.16 0 top
R35  560k  [0603]  133.35,30.35 0 top
R36  10k  [0603]  137.79,32.26 0 top
R37  1M  [TRIMPOT-TC33X]  141.16,39.75 0 top
R38  1k  [0603]  123.83,14.48 270 top
R39  1M  [TRIMPOT-TC33X]  136.53,39.75 0 top
R40  51k  [0603]  130.81,15.11 180 top
R41  43k  [0603]  170.05,27.18 270 top
R42  10k  [0603]  161.8,34.16 0 top
R43  560k  [0603]  161.8,30.35 0 top
R44  10k  [0603]  166.24,32.26 0 top
R45  1M  [TRIMPOT-TC33X]  169.61,39.75 0 top
R46  1k  [0603]  152.27,14.48 270 top
R47  1M  [TRIMPOT-TC33X]  164.97,39.75 0 top
R48  51k  [0603]  159.26,15.11 180 top
R49  43k  [0603]  198.5,27.18 270 top
R50  10k  [0603]  190.25,34.16 0 top
R51  560k  [0603]  190.25,30.35 0 top
R52  10k  [0603]  194.69,32.26 0 top
R53  1M  [TRIMPOT-TC33X]  198.06,39.75 0 top
R54  1k  [0603]  180.72,14.48 270 top
R55  1M  [TRIMPOT-TC33X]  193.42,39.75 0 top
R56  51k  [0603]  187.71,15.11 180 top
R57  43k  [0603]  226.95,27.18 270 top
R58  10k  [0603]  218.69,34.16 0 top
R59  560k  [0603]  218.69,30.35 0 top
R60  10k  [0603]  223.14,32.26 0 top
R61  1M  [TRIMPOT-TC33X]  226.5,39.75 0 top
R62  1k  [0603]  209.17,14.48 270 top
R63  1M  [TRIMPOT-TC33X]  221.87,39.75 0 top
R64  51k  [0603]  216.15,15.11 180 top
R65  43k  [0603]  27.81,63.25 270 top
R66  10k  [0603]  19.56,70.23 0 top
R67  560k  [0603]  19.56,66.42 0 top
R68  10k  [0603]  24,68.33 0 top
R69  1M  [TRIMPOT-TC33X]  27.37,75.82 0 top
R70  1k  [0603]  10.03,50.55 270 top
R71  1M  [TRIMPOT-TC33X]  22.73,75.82 0 top
R72  51k  [0603]  17.02,51.18 180 top
R73  43k  [0603]  56.26,63.25 270 top
R74  10k  [0603]  48.01,70.23 0 top
R75  560k  [0603]  48.01,66.42 0 top
R76  10k  [0603]  52.45,68.33 0 top
R77  1M  [TRIMPOT-TC33X]  55.82,75.82 0 top
R78  1k  [0603]  38.48,50.55 270 top
R79  1M  [TRIMPOT-TC33X]  51.18,75.82 0 top
R80  51k  [0603]  45.47,51.18 180 top
R81  43k  [0603]  84.71,63.25 270 top
R82  10k  [0603]  76.45,70.23 0 top
R83  560k  [0603]  76.45,66.42 0 top
R84  10k  [0603]  80.9,68.33 0 top
R85  1M  [TRIMPOT-TC33X]  84.26,75.82 0 top
R86  1k  [0603]  66.93,50.55 270 top
R87  1M  [TRIMPOT-TC33X]  79.63,75.82 0 top
R88  51k  [0603]  73.91,51.18 180 top
R89  43k  [0603]  113.16,63.25 270 top
R90  10k  [0603]  104.9,70.23 0 top
R91  560k  [0603]  104.9,66.42 0 top
R92  10k  [0603]  109.35,68.33 0 top
R93  1M  [TRIMPOT-TC33X]  112.71,75.82 0 top
R94  1k  [0603]  95.38,50.55 270 top
R95  1M  [TRIMPOT-TC33X]  108.08,75.82 0 top
R96  51k  [0603]  102.36,51.18 180 top
R97  43k  [0603]  141.6,63.25 270 top
R98  10k  [0603]  133.35,70.23 0 top
R99  560k  [0603]  133.35,66.42 0 top
R100  10k  [0603]  137.79,68.33 0 top
R101  1M  [TRIMPOT-TC33X]  141.16,75.82 0 top
R102  1k  [0603]  123.83,50.55 270 top
R103  1M  [TRIMPOT-TC33X]  136.53,75.82 0 top
R104  51k  [0603]  130.81,51.18 180 top
R105  43k  [0603]  170.05,63.25 270 top
R106  10k  [0603]  161.8,70.23 0 top
R107  560k  [0603]  161.8,66.42 0 top
R108  10k  [0603]  166.24,68.33 0 top
R109  1M  [TRIMPOT-TC33X]  169.61,75.82 0 top
R110  1k  [0603]  152.27,50.55 270 top
R111  1M  [TRIMPOT-TC33X]  164.97,75.82 0 top
R112  51k  [0603]  159.26,51.18 180 top
R113  43k  [0603]  198.5,63.25 270 top
R114  10k  [0603]  190.25,70.23 0 top
R115  560k  [0603]  190.25,66.42 0 top
R116  10k  [0603]  194.69,68.33 0 top
R117  1M  [TRIMPOT-TC33X]  198.06,75.82 0 top
R118  1k  [0603]  180.72,50.55 270 top
R119  1M  [TRIMPOT-TC33X]  193.42,75.82 0 top
R120  51k  [0603]  187.71,51.18 180 top
R121  43k  [0603]  226.95,63.25 270 top
R122  10k  [0603]  218.69,70.23 0 top
R123  560k  [0603]  218.69,66.42 0 top
R124  10k  [0603]  223.14,68.33 0 top
R125  1M  [TRIMPOT-TC33X]  226.5,75.82 0 top
R126  1k  [0603]  209.17,50.55 270 top
R127  1M  [TRIMPOT-TC33X]  221.87,75.82 0 top
R128  51k  [0603]  216.15,51.18 180 top
R129  43k  [0603]  27.81,99.31 270 top
R130  10k  [0603]  19.56,106.3 0 top
R131  560k  [0603]  19.56,102.49 0 top
R132  10k  [0603]  24,104.39 0 top
R133  1M  [TRIMPOT-TC33X]  27.37,111.89 0 top
R134  1k  [0603]  10.03,86.61 270 top
R135  1M  [TRIMPOT-TC33X]  22.73,111.89 0 top
R136  51k  [0603]  17.02,87.25 180 top
R137  43k  [0603]  56.26,99.31 270 top
R138  10k  [0603]  48.01,106.3 0 top
R139  560k  [0603]  48.01,102.49 0 top
R140  10k  [0603]  52.45,104.39 0 top
R141  1M  [TRIMPOT-TC33X]  55.82,111.89 0 top
R142  1k  [0603]  38.48,86.61 270 top
R143  1M  [TRIMPOT-TC33X]  51.18,111.89 0 top
R144  51k  [0603]  45.47,87.25 180 top
R145  43k  [0603]  84.71,99.31 270 top
R146  10k  [0603]  76.45,106.3 0 top
R147  560k  [0603]  76.45,102.49 0 top
R148  10k  [0603]  80.9,104.39 0 top
R149  1M  [TRIMPOT-TC33X]  84.26,111.89 0 top
R150  1k  [0603]  66.93,86.61 270 top
R151  1M  [TRIMPOT-TC33X]  79.63,111.89 0 top
R152  51k  [0603]  73.91,87.25 180 top
R153  43k  [0603]  113.16,99.31 270 top
R154  10k  [0603]  104.9,106.3 0 top
R155  560k  [0603]  104.9,102.49 0 top
R156  10k  [0603]  109.35,104.39 0 top
R157  1M  [TRIMPOT-TC33X]  112.71,111.89 0 top
R158  1k  [0603]  95.38,86.61 270 top
R159  1M  [TRIMPOT-TC33X]  108.08,111.89 0 top
R160  51k  [0603]  102.36,87.25 180 top
R161  43k  [0603]  141.6,99.31 270 top
R162  10k  [0603]  133.35,106.3 0 top
R163  560k  [0603]  133.35,102.49 0 top
R164  10k  [0603]  137.79,104.39 0 top
R165  1M  [TRIMPOT-TC33X]  141.16,111.89 0 top
R166  1k  [0603]  123.83,86.61 270 top
R167  1M  [TRIMPOT-TC33X]  136.53,111.89 0 top
R168  51k  [0603]  130.81,87.25 180 top
R169  43k  [0603]  170.05,99.31 270 top
R170  10k  [0603]  161.8,106.3 0 top
R171  560k  [0603]  161.8,102.49 0 top
R172  10k  [0603]  166.24,104.39 0 top
R173  1M  [TRIMPOT-TC33X]  169.61,111.89 0 top
R174  1k  [0603]  152.27,86.61 270 top
R175  1M  [TRIMPOT-TC33X]  164.97,111.89 0 top
R176  51k  [0603]  159.26,87.25 180 top
R177  43k  [0603]  198.5,99.31 270 top
R178  10k  [0603]  190.25,106.3 0 top
R179  560k  [0603]  190.25,102.49 0 top
R180  10k  [0603]  194.69,104.39 0 top
R181  1M  [TRIMPOT-TC33X]  198.06,111.89 0 top
R182  1k  [0603]  180.72,86.61 270 top
R183  1M  [TRIMPOT-TC33X]  193.42,111.89 0 top
R184  51k  [0603]  187.71,87.25 180 top
R185  43k  [0603]  226.95,99.31 270 top
R186  10k  [0603]  218.69,106.3 0 top
R187  560k  [0603]  218.69,102.49 0 top
R188  10k  [0603]  223.14,104.39 0 top
R189  1M  [TRIMPOT-TC33X]  226.5,111.89 0 top
R190  1k  [0603]  209.17,86.61 270 top
R191  1M  [TRIMPOT-TC33X]  221.87,111.89 0 top
R192  51k  [0603]  216.15,87.25 180 top
S1  [SWITCH-SPST-SMD-A]  16.41,39.5 0 top
S2  [SWITCH-SPST-SMD-A]  44.86,39.5 0 top
S3  [SWITCH-SPST-SMD-A]  73.3,39.5 0 top
S4  [SWITCH-SPST-SMD-A]  101.75,39.5 0 top
S5  [SWITCH-SPST-SMD-A]  130.2,39.5 0 top
S6  [SWITCH-SPST-SMD-A]  158.65,39.5 0 top
S7  [SWITCH-SPST-SMD-A]  187.1,39.5 0 top
S8  [SWITCH-SPST-SMD-A]  215.54,39.5 0 top
S9  [SWITCH-SPST-SMD-A]  16.41,75.56 0 top
S10  [SWITCH-SPST-SMD-A]  44.86,75.56 0 top
S11  [SWITCH-SPST-SMD-A]  73.3,75.56 0 top
S12  [SWITCH-SPST-SMD-A]  101.75,75.56 0 top
S13  [SWITCH-SPST-SMD-A]  130.2,75.56 0 top
S14  [SWITCH-SPST-SMD-A]  158.65,75.56 0 top
S15  [SWITCH-SPST-SMD-A]  187.1,75.56 0 top
S16  [SWITCH-SPST-SMD-A]  215.54,75.56 0 top
S17  [SWITCH-SPST-SMD-A]  16.41,111.63 0 top
S18  [SWITCH-SPST-SMD-A]  44.86,111.63 0 top
S19  [SWITCH-SPST-SMD-A]  73.3,111.63 0 top
S20  [SWITCH-SPST-SMD-A]  101.75,111.63 0 top
S21  [SWITCH-SPST-SMD-A]  130.2,111.63 0 top
S22  [SWITCH-SPST-SMD-A]  158.65,111.63 0 top
S23  [SWITCH-SPST-SMD-A]  187.1,111.63 0 top
S24  [SWITCH-SPST-SMD-A]  215.54,111.63 0 top
SJ1  LED-EN  [SJ_2S]  9.4,32.26 0 top
SJ2  LED-EN  [SJ_2S]  37.85,32.26 0 top
SJ3  LED-EN  [SJ_2S]  66.29,32.26 0 top
SJ4  LED-EN  [SJ_2S]  94.74,32.26 0 top
SJ5  LED-EN  [SJ_2S]  123.19,32.26 0 top
SJ6  LED-EN  [SJ_2S]  151.64,32.26 0 top
SJ7  LED-EN  [SJ_2S]  180.09,32.26 0 top
SJ8  LED-EN  [SJ_2S]  208.53,32.26 0 top
SJ9  LED-EN  [SJ_2S]  9.4,68.33 0 top
SJ10  LED-EN  [SJ_2S]  37.85,68.33 0 top
SJ11  LED-EN  [SJ_2S]  66.29,68.33 0 top
SJ12  LED-EN  [SJ_2S]  94.74,68.33 0 top
SJ13  LED-EN  [SJ_2S]  123.19,68.33 0 top
SJ14  LED-EN  [SJ_2S]  151.64,68.33 0 top
SJ15  LED-EN  [SJ_2S]  180.09,68.33 0 top
SJ16  LED-EN  [SJ_2S]  208.53,68.33 0 top
SJ17  LED-EN  [SJ_2S]  9.4,104.39 0 top
SJ18  LED-EN  [SJ_2S]  37.85,104.39 0 top
SJ19  LED-EN  [SJ_2S]  66.29,104.39 0 top
SJ20  LED-EN  [SJ_2S]  94.74,104.39 0 top
SJ21  LED-EN  [SJ_2S]  123.19,104.39 0 top
SJ22  LED-EN  [SJ_2S]  151.64,104.39 0 top
SJ23  LED-EN  [SJ_2S]  180.09,104.39 0 top
SJ24  LED-EN  [SJ_2S]  208.53,104.39 0 top
TP1  [PAD.03X.05]  28.45,35.56 0 bottom
TP2  [PAD.03X.05]  24,35.56 0 bottom
TP3  [PAD.03X.05]  56.9,35.56 0 bottom
TP4  [PAD.03X.05]  52.45,35.56 0 bottom
TP5  [PAD.03X.05]  85.34,35.56 0 bottom
TP6  [PAD.03X.05]  80.9,35.56 0 bottom
TP7  [PAD.03X.05]  113.79,35.56 0 bottom
TP8  [PAD.03X.05]  109.35,35.56 0 bottom
TP9  [PAD.03X.05]  142.24,35.56 0 bottom
TP10  [PAD.03X.05]  137.79,35.56 0 bottom
TP11  [PAD.03X.05]  170.69,35.56 0 bottom
TP12  [PAD.03X.05]  166.24,35.56 0 bottom
TP13  [PAD.03X.05]  199.14,35.56 0 bottom
TP14  [PAD.03X.05]  194.69,35.56 0 bottom
TP15  [PAD.03X.05]  227.58,35.56 0 bottom
TP16  [PAD.03X.05]  223.14,35.56 0 bottom
TP17  [PAD.03X.05]  28.45,71.63 0 bottom
TP18  [PAD.03X.05]  24,71.63 0 bottom
TP19  [PAD.03X.05]  56.9,71.63 0 bottom
TP20  [PAD.03X.05]  52.45,71.63 0 bottom
TP21  [PAD.03X.05]  85.34,71.63 0 bottom
TP22  [PAD.03X.05]  80.9,71.63 0 bottom
TP23  [PAD.03X.05]  113.79,71.63 0 bottom
TP24  [PAD.03X.05]  109.35,71.63 0 bottom
TP25  [PAD.03X.05]  142.24,71.63 0 bottom
TP26  [PAD.03X.05]  137.79,71.63 0 bottom
TP27  [PAD.03X.05]  170.69,71.63 0 bottom
TP28  [PAD.03X.05]  166.24,71.63 0 bottom
TP29  [PAD.03X.05]  199.14,71.63 0 bottom
TP30  [PAD.03X.05]  194.69,71.63 0 bottom
TP31  [PAD.03X.05]  227.58,71.63 0 bottom
TP32  [PAD.03X.05]  223.14,71.63 0 bottom
TP33  [PAD.03X.05]  28.45,107.7 0 bottom
TP34  [PAD.03X.05]  24,107.7 0 bottom
TP35  [PAD.03X.05]  56.9,107.7 0 bottom
TP36  [PAD.03X.05]  52.45,107.7 0 bottom
TP37  [PAD.03X.05]  85.34,107.7 0 bottom
TP38  [PAD.03X.05]  80.9,107.7 0 bottom
TP39  [PAD.03X.05]  113.79,107.7 0 bottom
TP40  [PAD.03X.05]  109.35,107.7 0 bottom
TP41  [PAD.03X.05]  142.24,107.7 0 bottom
TP42  [PAD.03X.05]  137.79,107.7 0 bottom
TP43  [PAD.03X.05]  170.69,107.7 0 bottom
TP44  [PAD.03X.05]  166.24,107.7 0 bottom
TP45  [PAD.03X.05]  199.14,107.7 0 bottom
TP46  [PAD.03X.05]  194.69,107.7 0 bottom
TP47  [PAD.03X.05]  227.58,107.7 0 bottom
TP48  [PAD.03X.05]  223.14,107.7 0 bottom
U1  NCS36000  [SO14]  15.11,19.56 180 top
U2  PIR  [PIR]  20.83,24.64 180 bottom
U3  PIR  [PIR]  49.28,24.64 180 bottom
U4  NCS36000  [SO14]  43.56,19.56 180 top
U5  PIR  [PIR]  77.72,24.64 180 bottom
U6  NCS36000  [SO14]  72.01,19.56 180 top
U7  PIR  [PIR]  106.17,24.64 180 bottom
U8  NCS36000  [SO14]  100.46,19.56 180 top
U9  PIR  [PIR]  134.62,24.64 180 bottom
U10  NCS36000  [SO14]  128.91,19.56 180 top
U11  PIR  [PIR]  163.07,24.64 180 bottom
U12  NCS36000  [SO14]  157.35,19.56 180 top
U13  PIR  [PIR]  191.52,24.64 180 bottom
U14  NCS36000  [SO14]  185.8,19.56 180 top
U15  PIR  [PIR]  219.96,24.64 180 bottom
U16  NCS36000  [SO14]  214.25,19.56 180 top
U17  PIR  [PIR]  20.83,60.71 180 bottom
U18  NCS36000  [SO14]  15.11,55.63 180 top
U19  PIR  [PIR]  49.28,60.71 180 bottom
U20  NCS36000  [SO14]  43.56,55.63 180 top
U21  PIR  [PIR]  77.72,60.71 180 bottom
U22  NCS36000  [SO14]  72.01,55.63 180 top
U23  PIR  [PIR]  106.17,60.71 180 bottom
U24  NCS36000  [SO14]  100.46,55.63 180 top
U25  PIR  [PIR]  134.62,60.71 180 bottom
U26  NCS36000  [SO14]  128.91,55.63 180 top
U27  PIR  [PIR]  163.07,60.71 180 bottom
U28  NCS36000  [SO14]  157.35,55.63 180 top
U29  PIR  [PIR]  191.52,60.71 180 bottom
U30  NCS36000  [SO14]  185.8,55.63 180 top
U31  PIR  [PIR]  219.96,60.71 180 bottom
U32  NCS36000  [SO14]  214.25,55.63 180 top
U33  PIR  [PIR]  20.83,96.77 180 bottom
U34  NCS36000  [SO14]  15.11,91.69 180 top
U35  PIR  [PIR]  49.28,96.77 180 bottom
U36  NCS36000  [SO14]  43.56,91.69 180 top
U37  PIR  [PIR]  77.72,96.77 180 bottom
U38  NCS36000  [SO14]  72.01,91.69 180 top
U39  PIR  [PIR]  106.17,96.77 180 bottom
U40  NCS36000  [SO14]  100.46,91.69 180 top
U41  PIR  [PIR]  134.62,96.77 180 bottom
U42  NCS36000  [SO14]  128.91,91.69 180 top
U43  PIR  [PIR]  163.07,96.77 180 bottom
U44  NCS36000  [SO14]  157.35,91.69 180 top
U45  PIR  [PIR]  191.52,96.77 180 bottom
U46  NCS36000  [SO14]  185.8,91.69 180 top
U47  PIR  [PIR]  219.96,96.77 180 bottom
U48  NCS36000  [SO14]  214.25,91.69 180 top
U$1  CWM 0.5 GI V1  [LENS-CWM-0.5-GI-V1]  20.83,24.64 0 bottom
U$2  CWM 0.5 GI V1  [LENS-CWM-0.5-GI-V1]  49.28,24.64 0 bottom
U$3  CWM 0.5 GI V1  [LENS-CWM-0.5-GI-V1]  77.72,24.64 0 bottom
U$4  CWM 0.5 GI V1  [LENS-CWM-0.5-GI-V1]  106.17,24.64 0 bottom
U$5  CWM 0.5 GI V1  [LENS-CWM-0.5-GI-V1]  134.62,24.64 0 bottom
U$6  CWM 0.5 GI V1  [LENS-CWM-0.5-GI-V1]  163.07,24.64 0 bottom
U$7  CWM 0.5 GI V1  [LENS-CWM-0.5-GI-V1]  191.52,24.64 0 bottom
U$8  CWM 0.5 GI V1  [LENS-CWM-0.5-GI-V1]  219.96,24.64 0 bottom
U$9  CWM 0.5 GI V1  [LENS-CWM-0.5-GI-V1]  20.83,60.71 0 bottom
U$10  CWM 0.5 GI V1  [LENS-CWM-0.5-GI-V1]  49.28,60.71 0 bottom
U$11  CWM 0.5 GI V1  [LENS-CWM-0.5-GI-V1]  77.72,60.71 0 bottom
U$12  CWM 0.5 GI V1  [LENS-CWM-0.5-GI-V1]  106.17,60.71 0 bottom
U$13  CWM 0.5 GI V1  [LENS-CWM-0.5-GI-V1]  134.62,60.71 0 bottom
U$14  CWM 0.5 GI V1  [LENS-CWM-0.5-GI-V1]  163.07,60.71 0 bottom
U$15  CWM 0.5 GI V1  [LENS-CWM-0.5-GI-V1]  191.52,60.71 0 bottom
U$16  CWM 0.5 GI V1  [LENS-CWM-0.5-GI-V1]  219.96,60.71 0 bottom
U$17  CWM 0.5 GI V1  [LENS-CWM-0.5-GI-V1]  20.83,96.77 0 bottom
U$18  CWM 0.5 GI V1  [LENS-CWM-0.5-GI-V1]  49.28,96.77 0 bottom
U$19  CWM 0.5 GI V1  [LENS-CWM-0.5-GI-V1]  77.72,96.77 0 bottom
U$20  CWM 0.5 GI V1  [LENS-CWM-0.5-GI-V1]  106.17,96.77 0 bottom
U$21  CWM 0.5 GI V1  [LENS-CWM-0.5-GI-V1]  134.62,96.77 0 bottom
U$22  CWM 0.5 GI V1  [LENS-CWM-0.5-GI-V1]  163.07,96.77 0 bottom
U$23  CWM 0.5 GI V1  [LENS-CWM-0.5-GI-V1]  191.52,96.77 0 bottom
U$24  CWM 0.5 GI V1  [LENS-CWM-0.5-GI-V1]  219.96,96.77 0 bottom

## Library data of the parts
C1 C3 C10 C12 C17 C19 C24 C26 C31 C33 C38 C40 C45 C47 C52 C54 C59 C61 C66 C68 C73 C75 C80 C82 C87 C89 C94 C96 C101 C103 C108 C110 C115 C117 C122 C124 C129 C131 C136 C138 C143 C145 C150 C152 C157 C159 C164 C166 = SparkFun-Capacitors; PROD_ID: CAP-08402
C2 C4 C11 C13 C18 C20 C25 C27 C32 C34 C39 C41 C46 C48 C53 C55 C60 C62 C67 C69 C74 C76 C81 C83 C88 C90 C95 C97 C102 C104 C109 C111 C116 C118 C123 C125 C130 C132 C137 C139 C144 C146 C151 C153 C158 C160 C165 C167 = SparkFun-Capacitors; PROD_ID: CAP-00867
C5-C9 C14-C16 C21-C23 C28-C30 C35-C37 C42-C44 C49-C51 C56-C58 C63-C65 C70-C72 C77-C79 C84-C86 C91-C93 C98-C100 C105-C107 C112-C114 C119-C121 C126-C128 C133-C135 C140-C142 C147-C149 C154-C156 C161-C163 C168 = SparkFun-Capacitors; PROD_ID: CAP-00810
D1-D24 = SparkFun-LED; PROD_ID: DIO-11076
E$1 SJ1-SJ24 = SparkFun-Retired
E$5 E$6 FD1-FD48 LOGO1-LOGO72 = SparkFun-Aesthetics
H1-H96 = SparkFun-Electromechanical
J1 J4 J6 J8 J9 J11 J13 J15 J17 J19 J21 J23 J25 J27 J29 J31 J33 J35 J37 J39 J41 J43 J45 J47 = SparkFun-Connectors; PROD_ID: CONN-09696
J2 J3 J5 J7 J10 J12 J14 J16 J18 J20 J22 J24 J26 J28 J30 J32 J34 J36 J38 J40 J42 J44 J46 J48 U$1-U$24 = openPIR-temp
R1 R3 R10 R12 R18 R20 R26 R28 R34 R36 R42 R44 R50 R52 R58 R60 R66 R68 R74 R76 R82 R84 R90 R92 R98 R100 R106 R108 R114 R116 R122 R124 R130 R132 R138 R140 R146 R148 R154 R156 R162 R164 R170 R172 R178 R180 R186 R188 = SparkFun-Resistors; PROD_ID: RES-00824
R2 R11 R19 R27 R35 R43 R51 R59 R67 R75 R83 R91 R99 R107 R115 R123 R131 R139 R147 R155 R163 R171 R179 R187 = openPIR-temp; PROD_ID: RES-10301
R4 R7 R13 R15 R21 R23 R29 R31 R37 R39 R45 R47 R53 R55 R61 R63 R69 R71 R77 R79 R85 R87 R93 R95 R101 R103 R109 R111 R117 R119 R125 R127 R133 R135 R141 R143 R149 R151 R157 R159 R165 R167 R173 R175 R181 R183 R189 R191 = openPIR-temp; PROD_ID: RES-13431
R5 R9 R17 R25 R33 R41 R49 R57 R65 R73 R81 R89 R97 R105 R113 R121 R129 R137 R145 R153 R161 R169 R177 R185 = SparkFun-Resistors; PROD_ID: RES-07858
R6 R16 R24 R32 R40 R48 R56 R64 R72 R80 R88 R96 R104 R112 R120 R128 R136 R144 R152 R160 R168 R176 R184 R192 = openPIR-temp; PROD_ID: RES-08495
R8 R14 R22 R30 R38 R46 R54 R62 R70 R78 R86 R94 R102 R110 R118 R126 R134 R142 R150 R158 R166 R174 R182 R190 = SparkFun-Resistors; PROD_ID: RES-07856
S1-S24 = SparkFun-Electromechanical; PROD_ID: SWCH-10651
TP1-TP48 = SparkFun-Connectors
U1 U4 U6 U8 U10 U12 U14 U16 U18 U20 U22 U24 U26 U28 U30 U32 U34 U36 U38 U40 U42 U44 U46 U48 = openPIR-temp; PROD_ID: IC-13432
U2 U3 U5 U7 U9 U11 U13 U15 U17 U19 U21 U23 U25 U27 U29 U31 U33 U35 U37 U39 U41 U43 U45 U47 = openPIR-temp; PROD_ID: IC-13430